# Altium PCB PCB1.PcbDoc
Units mil, origin at the board's own origin, x right, y up, seen from the top; angles counter-clockwise.
Board outline 2950 x 500 mil, 2 copper layers (Top Layer, Bottom Layer); 32 components, 25 nets, 151 pads, 54 vias.
Unrouted connection lines stored in the file: 3.
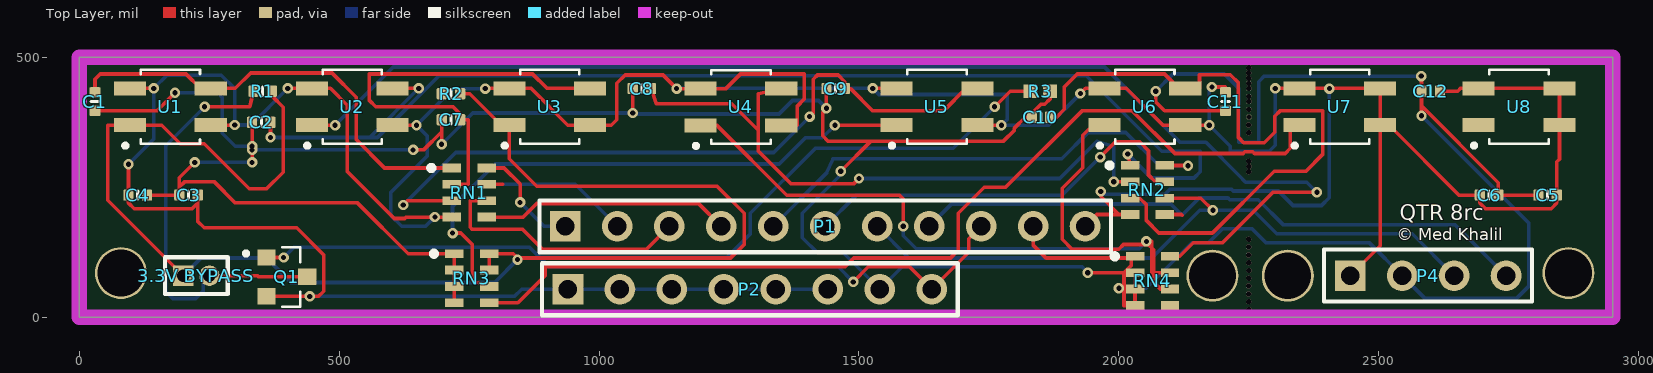
[diagram p0: Top Layer view]
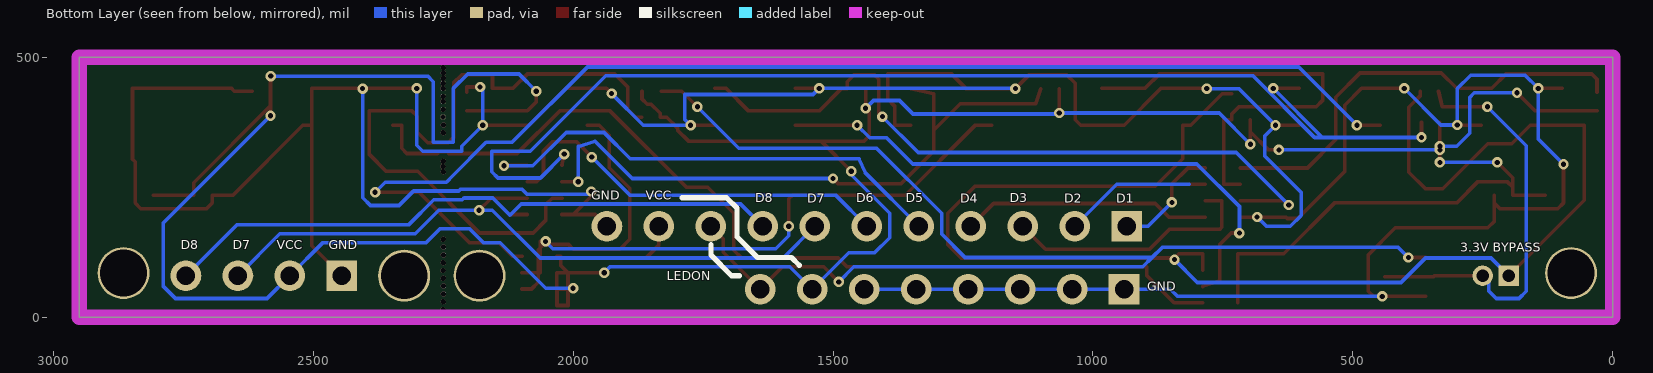
[diagram p1: Bottom Layer view, seen from below]
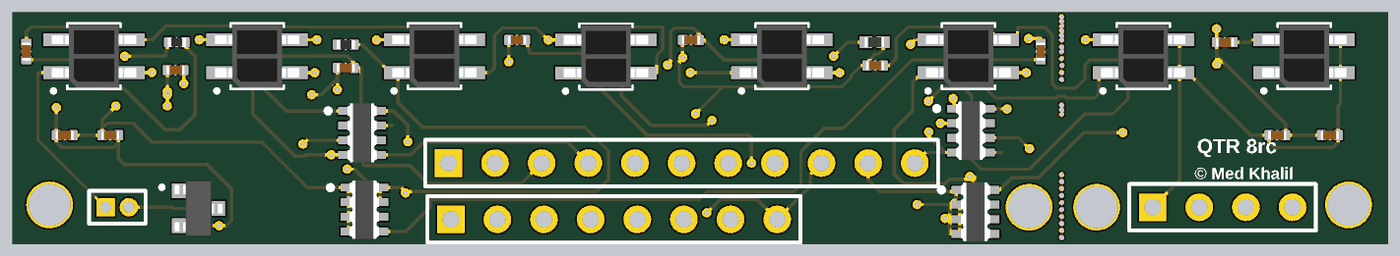
[diagram p2: 3D render of the assembled board from above, using the file's embedded part models]

## Layer stack, top to bottom
Top Solder: solder mask 0.4, Solder Resist, Dk 3.5
Top Layer: signal copper 1.4
Dielectric 1: dielectric 12.6, FR-4, Dk 4.8
Bottom Layer: signal copper 1.4
Bottom Solder: solder mask 0.4, Solder Resist, Dk 3.5

## Board outline
0,0 0,500 2950,500 2950,0

## Design rules (kind name [scope] priority, off if disabled: settings)
Clearance [All] p1: gap=10 ignorepadtopadclearanceinfootprint=FALSE
PolygonConnect [All] p1: connectstyle=Relief reliefconductorwidth=10 reliefentries=4 polygonreliefangle="90 Angle" airgapwidth=10
RoutingVias [All] p1: holewidth=10 width=20 viastyle="Through Hole" minholewidth=10 minwidth=20 maxholewidth=10 maxwidth=20
SolderMaskExpansion [All] p1: expansion=4 istentingtop=FALSE
SupplyNets "Schematic Supply Nets_2" [InNet('GND')] p1: voltage=0.000
SupplyNets "Schematic Supply Nets" [InNet('VCC')] p2: voltage=0.000
Width [All] p1: maxlimit=7 minlimit=7 preferedwidth=7 minimp=50.000000 maximp=50.000000 favimp=50.000000
30 further rules are at their usual default settings.

## Components (designator, comment, footprint, x,y, rotation, side; value= is the part's Value field where it differs from the comment)
"3.3V BYPASS" "MHDR1X2" MHDR1X2 200,80 r0 top
C1 "Capacitor 100nF +/-20% 10V 0402" CAPC0402(1005)60_L 30,415 r90 top value=10nF
C2 "Capacitor 100nF +/-20% 10V 0402" CAPC0402(1005)60_L 350,375 r0 top value=10nF
C3 "Capacitor 100nF +/-20% 10V 0402" CAPC0402(1005)60_L 210,235 r180 top value=1µF
C4 "Capacitor 100nF +/-20% 10V 0402" CAPC0402(1005)60_L 112.28,235 r0 top value=100nF
C5 "Capacitor 100nF +/-20% 10V 0402" CAPC0402(1005)60_L 2825,235 r180 top value=1µF
C6 "Capacitor 100nF +/-20% 10V 0402" CAPC0402(1005)60_L 2712.28,235 r0 top value=100nF
C7 "Capacitor 100nF +/-20% 10V 0402" CAPC0402(1005)60_L 715,380 r0 top value=10nF
C8 "Capacitor 100nF +/-20% 10V 0402" CAPC0402(1005)60_L 1082.28,440 r0 top value=10nF
C9 "Capacitor 100nF +/-20% 10V 0402" CAPC0402(1005)60_L 1455,440 r0 top value=10nF
C10 "Capacitor 100nF +/-20% 10V 0402" CAPC0402(1005)60_L 1850,385 r0 top value=10nF
C11 "Capacitor 100nF +/-20% 10V 0402" CAPC0402(1005)60_L 2205,415 r90 top value=10nF
C12 "Capacitor 100nF +/-20% 10V 0402" CAPC0402(1005)60_L 2600,435 r0 top value=10nF
P1 "Header 11" HDR1X11 935,175 r0 top
P2 "Header 8" HDR1X8 940,53.94 r0 top
P4 "Header 4" HDR1X4 2445,80 r0 top
Q1 "2N7002" TRANS_2N7002 399.37,77.6 r0 top
R1 "Resistor 9K1  +/-5 % 0402 63 mW" RESC0402(1005)_L 352.72,435 r0 top value=47
R2 "Resistor 9K1  +/-5 % 0402 63 mW" RESC0402(1005)_L 715,430 r0 top value=47
R3 "Resistor 51k +/-5% 0402 63 mW" RESC1005X40X25ML05T10 1848.7,435 r0 top value=47k
RN1 "CAY16-102J4LF" BOUR-CAY16-J4_V 750,240 r0 top value=1k
RN2 "CAY16-102J4LF" BOUR-CAY16-J4_V 2055,245 r0 top value=1k
RN3 "CAY16-102J4LF" BOUR-CAY16-J4_V 755,75 r0 top value=1k
RN4 "CAY16-102J4LF" BOUR-CAY16-J4_V 2065,70 r0 top value=1k
U1 "QRE1113GR" SOIC180P460X187-4N 175,405 r90 top
U2 "QRE1113GR" SOIC180P460X187-4N 525,405 r90 top
U3 "QRE1113GR" SOIC180P460X187-4N 905,405 r90 top
U4 "QRE1113GR" SOIC180P460X187-4N 1272.76,404.57 r90 top
U5 "QRE1113GR" SOIC180P460X187-4N 1650,405 r90 top
U6 "QRE1113GR" SOIC180P460X187-4N 2050,405 r90 top
U7 "QRE1113GR" SOIC180P460X187-4N 2425,405 r90 top
U8 "QRE1113GR" SOIC180P460X187-4N 2770,405 r90 top

## Footprints (in the part's own frame and the unit in brackets; to place one, negate y for a bottom-side part, rotate by r counter-clockwise, add the part's x,y. Pads: shape width x height; smd on the part's side, far side on the other; paste and mask are expansions set on the pad)
BOUR-CAY16-J4_V [mm] "SMD, 8-Leads, Body 1.6x3.2mm, Pitch 0.8mm"
  rect 0.9x0.425 smd: 1(-0.85,1.2) 2(-0.85,0.4) 3(-0.85,-0.4) 4(-0.85,-1.2) 5(0.85,-1.2) 6(0.85,-0.4) 7(0.85,0.4) 8(0.85,1.2)
  silkscreen extent -1.97,1.08 -1.72,1.32, body extent -0.8,-1.6 0.8,1.6, height 0.6
CAPC0402(1005)60_L [mm] "Chip Capacitor, Body 1.0x0.5mm, Height 0.6mm, IPC High Density"
  rrect25% 0.5x0.55 smd: 1(-0.45,0) 2(0.45,0)
  silkscreen extent 0,-0.2 0,0.2, body extent -0.5,-0.25 0.5,0.25, height 0.6
HDR1X4 [mm] "Connector; Header; 4 Position"
  rect 1.5x1.5 hole 0.9: 1(0,0)
  round 1.5 hole 0.9: 2(2.54,0) 3(5.08,0) 4(7.62,0)
  silkscreen extent -1.27,-1.27 8.89,1.27
HDR1X8 [mm] "Connector; Header; 8 Position"
  rect 1.5x1.5 hole 0.9: 1(0,0)
  round 1.5 hole 0.9: 2(2.54,0) 3(5.08,0) 4(7.62,0) 5(10.16,0) 6(12.7,0) 7(15.24,0) 8(17.78,0)
  silkscreen extent -1.27,-1.27 19.05,1.27
HDR1X11 [mm] "Connector; Header; 11 Position"
  rect 1.5x1.5 hole 0.9: 1(0,0)
  round 1.5 hole 0.9: 2(2.54,0) 3(5.08,0) 4(7.62,0) 5(10.16,0) 6(12.7,0) 7(15.24,0) 8(17.78,0) 9(20.32,0) 10(22.86,0) 11(25.4,0)
  silkscreen extent -1.27,-1.27 26.67,1.27
MHDR1X2 [mm] "Connector; Header; 2 Position"
  rect 1x1 hole 0.6: 1(0,0)
  round 1 hole 0.6: 2(1.27,0)
  silkscreen extent -0.9,-0.9 2.17,0.9
RESC0402(1005)_L [mm] "Chip Resistor, Body 1.0x0.5mm, IPC High Density"
  rrect25% 0.5x0.55 smd: 1(-0.45,0) 2(0.45,0)
  silkscreen extent 0,-0.2 0,0.2, body extent -0.5,-0.25 0.5,0.25, height 0.3
RESC1005X40X25ML05T10 [mm] "Chip Resistor, 2-Leads, Body 1.05x0.55mm, IPC Low Density"
  rect 0.7x0.65 smd: 1(-0.475,0) 2(0.475,0)
  body extent -0.53,-0.28 0.53,0.28, height 0.4
SOIC180P460X187-4N [mm]
  rect 0.69x1.57 smd: 1(-0.9,1.975) 2(-0.9,-1.975) 3(0.9,-1.975) 4(0.9,1.975)
  silkscreen extent -2,-1.45 1.8,2.3, body extent -1.7,-2.3 1.7,2.3, height 1.87
TRANS_2N7002 [mm]
  rect 0.9x0.8 smd: 1(-1,0.95) 2(-1,-0.95) 3(1,0)
  silkscreen extent -2.1,-1.45 0.65,1.45, body extent -1.3,-1.53 1.3,1.52, height 1.3

## Part data
"3.3V BYPASS": library part CMP-002-00385-1, "Header, 2-Pin", Component Type=Standard, Design Item ID=MHDR1X2, LatestRevisionDate=17-Jul-2002, LatestRevisionNote="Re-released for DXP Platform.", Pins=2, Publisher="Altium Limited", Source="Miscellaneous Connectors.SchLib"
C1 C2 C3 C4 C5 C6 C7 C8 C9 C10 C11 C12: library part CMP-001-00061-3, "Chip Capacitor, 100nF +/-20%, 10V, 0402, Thickness 0.6 mm", Case/Package=0402, Max Operating Temperature=85°C, Min Operating Temperature=-55°C, Tolerance=20%, Voltage Rating=10V, Mounting Technology=SMT, Pins=2
P1: library part CMP-002-00098-1, "Header, 11-Pin", Component Type=Standard, Design Item ID="Header 11", LatestRevisionDate=17-Jul-2002, LatestRevisionNote="Re-released for DXP Platform.", Pins=11, Publisher="Altium Limited", Source="Miscellaneous Connectors.SchLib"
P2: library part CMP-002-00188-1, "Header, 8-Pin", Component Type=Standard, Design Item ID="Header 8", LatestRevisionDate=17-Jul-2002, LatestRevisionNote="Re-released for DXP Platform.", Pins=8, Publisher="Altium Limited", Source="Miscellaneous Connectors.SchLib"
P4: library part CMP-002-00168-1, "Header, 4-Pin", Component Type=Standard, Design Item ID="Header 4", LatestRevisionDate=17-Jul-2002, LatestRevisionNote="Re-released for DXP Platform.", Pins=4, Publisher="Altium Limited", Source="Miscellaneous Connectors.SchLib"
Q1: "MOSFET, SOT-23, N, 60V, 0.28A, 5â„", Package="SOT-23 Diotec", Check_prices=https://www.snapeda.com/parts/2N7002/Diotec/view-part/?ref=eda, MF="Diotec Semiconductor", MP=2N7002, SnapEDA_Link=https://www.snapeda.com/parts/2N7002/Diotec/view-part/?ref=snap
R1 R2: library part CMP-009-00135-3, "Chip Resistor, 9,1 kOhms, +/-5 %, 63 mW, -55 to 155 degC, 0402", Case/Package=0402, Max Operating Temperature=155°C, Min Operating Temperature=-55°C, Power=63mW, Tolerance=5%, Pins=2
R3: library part CMP-009-00000-5, "Chip Resistor, 51 KOhm, +/- 5%, 0.063 W, -55 to 155 degC, 0402 (1005 Metric)", Case/Package=0402, Max Operating Temperature=155°C, Min Operating Temperature=-55°C, Power=63mW, Tolerance=5%, Mounting Technology=SM, Pins=2, RoHS Compliant=True
RN1 RN2 RN3 RN4: library part CMP-009-00042-4, "Chip Resistor Array, 1 KOhm, +/- 5%, 62.5 mW, -55 to 125 degC, 8-Pin SMD, RoHS, Tape and Reel", Case/Package=1205, Manufacturer=Bourns, Max Operating Temperature=125°C, Min Operating Temperature=-55°C, Package Description="8-Pin Surface Mount Device, Body 1.6 x 3.2 mm, Pitch 0.8 mm", Package Quantity=5000, Package Reference=CAY16-J4, Power=250mW, Tolerance=5%, Voltage Rating=50V, Datasheet URL=http://www.bourns.com/pdfs/CATCAY.pdf, Datasheet Version=Sep-14, Elements=4, Manufacturer URL=http://www.bourns.com/, Mounting Technology=SM, Packaging=TapeandReel, Pins=8, RoHS Compliant=True
U1 U2 U3 U4 U5 U6 U7 U8: "Reflective Optical Sensor 0.039 (1mm) 4-SMD, Gull Wing", Package="ARUSM-313-4 ON Semiconductor", Availability="In Stock", Check_prices=https://www.snapeda.com/parts/QRE1113GR/Onsemi/view-part/?ref=eda, MF="ON Semiconductor", MP=QRE1113GR, Price=None, Purchase-URL=https://pricing.snapeda.com/search/part/QRE1113GR/?ref=eda, SnapEDA_Link=https://www.snapeda.com/parts/QRE1113GR/Onsemi/view-part/?ref=snap

## Free pads (board coordinates)
  round 100 hole 90: 15(80,85) 15(2180,80) 15(2325,80) 15(2865,85)
  round 10 hole 10: 17(2250,15) 17(2250,30) 17(2250,45) 17(2250,60) 17(2250,75) 17(2250,90) 17(2250,105) 17(2250,120) 17(2250,135) 17(2250,150) 17(2250,280) 17(2250,290) 17(2250,300) 17(2250,355) 17(2250,370) 17(2250,400) 17(2250,415) 17(2250,425) 17(2250,440) 17(2250,450) 17(2250,460) 17(2250,470) 17(2250,480) 17(2250,490) 17(2250.38,385.3)

## Via types
v1: diameter 20, hole 10, Top Layer to Bottom Layer, 54 vias

## Nets (pads, with @x,y where several pads share a name; then routed paths per layer and width w, separated by ;. In a path a pad name is that pad's centre, name@x,y a point inside that pad or via, vN(x,y) a via of type N, cw(c..) or ccw(c..) an arc to the next point about the centre after c; other vN are vias at no path point)
D1: P1.1 RN1.8 | length 218.7
  Top Layer w7: RN1.8 817,287.24 848,256.24 v1(848,221)
  Bottom Layer w7: v1(848,221) 894,175 P1.1
D2: P1.2 RN1.7 | length 285
  Top Layer w7: RN1.7 814.75,255.75
  Bottom Layer w7: 814.75,255.75 954.25,255.75 P1.2
D3: P1.3 RN1.6 | length 501.3
  Top Layer w7: RN1.6 752,224.25 752,173 755.48,169.52 852.48,169.52 891,131 1091,131 P1.3
D4: P1.4 RN1.5 | length 480.6
  Top Layer w7: RN1.5 854,192.76 880.24,219 1191,219 P1.4
D5: P1.5 RN2.8 | length 950.3
  Top Layer w7: RN2.8 2088.84,291.87 2132.63,291.87 v1(2133,291.5)
  Bottom Layer w7: P1.5 1437.49,277.49 1450,304.77 1890,304.77 1940.73,355.5 2013.5,355.5 2077.5,291.5 v1(2133,291.5)
D6: P1.6 RN2.7 | length 780
  Top Layer w7: v1(1964.15,308.15) 1993.5,337.5 2040,337.5 2057,320.5 2057,273.75 2070,260.75 RN2.7
  Bottom Layer w7: P1.6 1495.03,235.03 1891.03,235.03 v1(1964.15,308.15)
D7: P1.7 P4.3 RN2.6 | length 1327.7
  Top Layer w7: RN2.6 2157.75,229.25 v1(2181,206)
  Bottom Layer w7: P1.7 1596,114 2063.5,114 2155.5,206 v1(2181,206) 2258.71,206 2304.05,160.66 2564.34,160.66 P4.3
D8: P1.8 P4.4 RN2.5 | length 1246.2
  Top Layer w7: RN2.5 2120.24,197.76 2121.62,196.38
  Bottom Layer w7: P1.8 1678.03,218.03 2099.97,218.03 2121.62,196.38 2154.74,229.5 2209.85,229.5 2213.35,226 2268.46,226 2316.8,177.66 2647.34,177.66 P4.4
GND: C3.1 C4.1 C5.1 C6.1 C11.2 C12.2 P1.11 P2.1 P2.2 P2.3 P2.4 P2.5 P2.6 P4.1 Q1.2 RN1.4 RN2.4 U1.2 U1.4 U2.2 U2.4 U3.2 U3.4 U4.2 U4.4 U5.2 U5.4 U6.2 U6.4 U7.2 U7.3 U7.4 U8.2 U8.3 U8.4 | length 8182.6
  Top Layer w7: v1(94.57,294.57) C4.1 94.57,220 105.57,209 216.72,209 227.72,220 ; U1.4 v1(143,440.43) ; C3.1 227.72,220 ; U1.2 298.57,369.57 v1(299,370) ; Q1.2 v1(443.2,40.2) 460,40.2 470,50.2 470,120 418,172 240,172 227.72,184.28 227.72,220 ; v1(401,440.43) U2.4 483,440.43 515.5,407.93 515.5,280.5 606,190 626,190 628.76,192.76 v1@684.24,192.76 ; U2.2 v1(648.66,369.57) ; v1(684,193) v1@684.24,192.76 ; RN1.4 v1@684.24,192.76 ; v1(781,440) 781.43,440.43 U3.4 869,440.43 939.87,369.57 U3.2 1023.57,369.57 1034,380 1034,450 1050,466 1123,466 v1(1149,440) U4.4 1244,440 1272,468 1394.92,468 1394.92,419.92 1381.5,406.5 1381.5,369.13 U4.2 ; v1(1526.43,440.43) U5.4 ; U5.2 v1(1774,369.57) ; v1(1926,430.43) 1936,440.43 U6.4 2014,440.43 2084.87,369.57 U6.2 v1(2174,369.57) ; P1.11 1957.76,197.76 2000,197.76 ; v1(1965,242) 1965,232.76 2000,197.76 ; RN2.4 2000,197.76 ; v1(2179,443) 2205,443 C11.2 ; v1(2301,440.43) U7.4 v1@2404.57,440.43 ; v1(2405,440) v1@2404.57,440.43 ; P4.1 2502.76,137.76 U7.2 ; C12.2 2652,435 2657.43,440.43 U8.4 U8.3 U8.2 2847.76,304.04 2842.72,299 C5.1 2842.72,220 2831.72,209 2705.57,209 2694.57,220 C6.1 2654.57,235 2520,369.57 U7.2 ; v1@2404.57,440.43 U7.3 U7.2
  Bottom Layer w7: v1(94.57,294.57) 143,343 v1(143,440.43) 168.45,465.89 273.11,465.89 299,440 v1(299,370) 330.57,370 v1(401,440.43) ; v1(443.2,40.2) 837.2,40.2 850.94,53.94 P2.1 P2.2 P2.3 P2.4 P2.5 P2.6 ; v1(684,193) 666,175 620,175 599,196 599,240 669,310 669,349.23 v1(648.66,369.57) 719.1,440 v1(781,440) ; v1(1149,440) 1149.43,440.43 v1(1526.43,440.43) 1538.37,428.5 1785,428.5 1785,380.57 v1(1774,369.57) 1865.13,369.57 v1(1926,430.43) ; v1(1965,242) 1970,237 2089,237 2098.5,246.5 2216.9,246.5 2220.4,243 2307,243 2335,215 2390,215 2405,230 v1(2405,440) ; v1(2179,443) 2174,438 v1(2174,369.57) 2214.5,329.07 2214.5,319.5 2289.5,319.5 2301,331 v1(2301,440.43)
L1: "3.3V BYPASS.1" R1.2 R2.2 RN3.7 RN3.8 U1.1 U3.1 | length 2890.8
  Top Layer w7: 200,80 54.75,225.25 54.75,369.57 U1.1 158.43,369.57 194,334 240,334 327,247 360,247 392,279 392,404 370.43,425.57 R1.2 ; R2.2 751,430 811.43,369.57 U3.1@827,369.57 ; RN3.7 RN3.8 834.72,122.24 843,113.97 v1@845.97,113.97 ; U3.1 U3.1@827,369.57 ; v1(843,111) v1@845.97,113.97 ; U3.1@827,369.57 827,305 880,252 1227,252 1279,200 1279,140 1252.97,113.97 v1@845.97,113.97
  Bottom Layer w7: 200,80 234,114 360,114 407,67 799,67 v1(843,111)
L3: RN3.6 U5.1 | length 1121.4
  Top Layer w7: v1(718,162) 734,162 756,140 756,70 RN3.6 ; v1(1453.63,369.57) U5.1
  Bottom Layer w7: v1(718,162) 718,213 800,295 1346.76,295 1397.01,345.25 1429.32,345.25 v1(1453.63,369.57)
L4: RN3.5 U7.1 | length 1848.8
  Top Layer w7: RN3.5 843.76,27.76 896,80 896,96.97 1473.14,96.97 1490.14,113.97 1675.97,113.97 1691,129 1691,200 1741,250 1782,250 1929,397 2026,397 2108,315 2238.84,315 2242.34,318.5 2257.66,318.5 2261.16,315 2320,315 2330,325 2330,369.57 U7.1
L5: RN4.8 U2.1 | length 2413.6
  Top Layer w7: U2.1 v1(492,369.57) ; RN4.8 2117,117.24 2143.26,143.5 2199.5,143.5 2296.59,240.59 v1(2381,240.59)
  Bottom Layer w7: v1(492,369.57) 603.93,481.5 1972.5,481.5 2117.5,336.5 2167.5,336.5 2231.5,272.5 2231.5,272.34 2243.84,260 2361.59,260 v1(2381,240.59)
L6: RN4.7 U4.1 | length 1109.4
  Top Layer w7: U4.1 1226.87,369.13 1361,235 1578,235 1585,228 v1(1585,175) ; v1(2053,146) 2063,146 2063,85.75 RN4.7
  Bottom Layer w7: v1(1585,175) 1585,156.97 1610,131.97 2038.97,131.97 v1(2053,146)
L7: RN4.6 U6.1 | length 557.6
  Top Layer w7: U6.1 1950,369.57 1930.43,350 1930.43,287.43 1891,248 1891,150 1910,131 2000,131 2009,140 2057,140 2067,130 2067,67.25 2080,54.25 RN4.6
L8: RN4.5 U8.1
LEDON: P1.9 P2.8 Q1.1 R3.1 | length 2606
  Top Layer w7: Q1.1 v1(393,115) ; v1(1489,68) 1517.97,96.97 1596.97,96.97 P2.8 1711.04,124.98 1711.04,151.04 P1.9 ; v1(1761,405) 1791,435 R3.1
  Bottom Layer w7: v1(393,115) 412.91,134.91 866.22,134.91 886.12,115 ; v1(1489,68) 1460,97 904.12,97 886.12,115 ; v1(1761,405) 1681.35,325.35 1416.35,325.35 1291,200 1291,160 1246,115 886.12,115
"Net3.3V BYPASS_2": "3.3V BYPASS.2" Q1.3 R1.1 | length 812.2
  Top Layer w7: v1(241,405) 328,405 R1.1 ; 250,80 343,80 345.4,77.6 Q1.3
  Bottom Layer w7: v1(241,405) 166,330 166,50 180,36 224,36 238,50 238,68 250,80
R1: C1.2 RN1.1 U1.3 | length 863.1
  Top Layer w7: C1.2 30,458 40,468 205,468 232.57,440.43 U1.3 300,440.43 329.57,470 486,470 532.5,423.5 532.5,341.89 587.15,287.24 RN1.1
R2: C7.2 RN1.2 U3.3 | length 854.8
  Top Layer w7: RN1.2 748,255.75 748,380 C7.2 732.72,391.28 719,405 570,405 558,417 558,468 872,468 899.57,440.43 U3.3
R3: C9.2 RN1.3 U5.3 | length 1397.7
  Top Layer w7: v1(623,216) 631.25,224.25 RN1.3 ; v1(1405,386) 1411.92,392.92 1411.92,457.92 1420,466 1460,466 1472.72,453.28 C9.2 1483.5,440 1526.5,397 1662.57,397 1706,440.43 U5.3
  Bottom Layer w7: v1(623,216) 724,317 1336,317 v1(1405,386)
R5: C2.2 RN2.1 U2.3 | length 2336
  Top Layer w7: v1(367.72,346) C2.2 ; U2.3 v1(653,440.43) ; v1(2017,314) RN2.1
  Bottom Layer w7: v1(367.72,346) 558.57,346 ; v1(653,440.43) 558.57,346 ; v1(2017,314) 2063,268 2144.5,268 2156.5,280 2156.5,319.5 2082.5,319.5 1937.5,464.5 691.93,464.5 573.43,346 558.57,346
R6: C8.2 RN2.2 U4.3 | length 1248.4
  Top Layer w7: C8.2 1110,411 1255,411 1306,360 ; U4.3 1306,430 1306,360 ; v1(1500,267) 1489.57,256.57 1369.43,256.57 1306,320 1306,360 ; v1(1990,260.75) RN2.2
  Bottom Layer w7: v1(1500,267) 1886.44,267 1957.94,338.5 1990,328.5 v1(1990,260.75)
R7: C10.2 RN2.3 U6.3 | length 1343.2
  Top Layer w7: C10.2 1880,385 1895,400 1895,443 1920,468 2088,468 2115.57,440.43 U6.3 2155.16,440.43 2155.16,466.74 2214.26,466.74 2230,451 2230,346 2240,336 2280,336 2300,356 2300,387 2310,397 2392,397 2392,313 2360,281 2299,281 2180,162 2077,162 2053,186 2053,216.25 2040,229.25 RN2.3
VCC: C1.1 C2.1 C3.2 C4.2 C5.2 C6.2 C7.1 C8.1 C9.1 C10.1 C11.1 C12.1 P1.10 P2.7 P4.2 R3.2 RN3.1 RN3.2 RN3.3 RN3.4 RN4.1 RN4.2 RN4.3 RN4.4 | length 7314.3
  Top Layer w7: C1.1 149.28,397.28 v1(184,432) ; C4.2 C3.2 192.28,250 ; v1(222,298) 192.28,268.28 192.28,250 ; v1(332.28,298) v1(332.28,322) v1(332.28,329) C2.1 ; v1(642,322) 662,322 697,357 ; v1(697,333) 697,357 ; RN3.4 721,27.76 721,59.25 RN3.3 RN3.2 721,90.75 RN3.1@721,122.24 ; RN3.1 RN3.1@721,122.24 ; v1(1064.57,393) C8.1 ; C9.1 v1(1437.28,402) 1430,394.72 1430,349 1440,339 1523,339 ; v1(1465,281) 1523,339 ; P1.10 1835,139 1860,114 2022.76,114 RN4.1@2023.95,115.19 ; R3.2 1867.4,420 1857.4,410 1850,410 1832.28,392.28 C10.1 1820,385 1799,364 1799,360 1778,339 1523,339 ; v1(1940.25,85.75) 2010,85.75 ; v1(2000,56) 2001.75,54.25 2010,54.25 ; RN4.4 RN4.4@2031,22.76 ; RN4.1 RN4.1@2026,117.24 ; v1(2071,435) 2071,414.28 2088,397.28 C11.1 ; v1(2582,464) 2582.28,463.72 C12.1 2582.28,406.72 ; v1(2582.28,387.72) 2582.28,406.72 ; C5.2 C6.2 2730,259 2582.28,406.72 ; 192.28,250 203.28,261 259,261 300,220 535.24,220 633,122.24 RN3.1@721,122.24 ; 697,357 697.28,357.28 C7.1 697,357 ; 2010,54.25 RN4.3@2031,54.25 ; 2010,54.25 2010,85.75 ; 2010,54.25 2010,22.76 RN4.4@2031,22.76 ; 2010,85.75 2023.95,99.7 RN4.1@2023.95,115.19 ; 2010,85.75 RN4.2 RN4.3 RN4.3@2031,54.25 ; RN4.1@2023.95,115.19 RN4.1@2026,117.24 ; RN4.1@2023.95,115.19 2023.95,117.24 RN4.1@2026,117.24 ; RN4.4@2031,22.76 RN4.3@2031,54.25
  Bottom Layer w7: v1(184,432) 266,432 275,423 275,354 300,329 v1(332.28,329) ; v1(222,298) v1(332.28,298) ; v1(332.28,322) v1(642,322) ; v1(697,333) 757,393 v1(1064.57,393) 1066.57,391 1346,391 1372,417 1422.28,417 v1(1437.28,402) ; v1(1465,281) 1465,274 1391,200 1391,153 1420,124 1469.94,124 P2.7 1583.06,97 1929,97 v1(1940.25,85.75) ; v1(2000,56) 2052.5,56 2140,143.5 2172.5,143.5 2199,170 2256.46,170 2282.8,143.66 2481.34,143.66 P4.2 2589,36 2765,36 2789,60 2789,181 v1(2582.28,387.72) ; v1(2071,435) 2104,468 2203,468 2231,440 2231,336.5 2269,336.5 2269,453 2280,464 v1(2582,464)
pads on no net: R2.1

## Keep-outs
Keep-Out Layer:
  the board outline again, w30

## Silkscreen, mask and mechanical layers (free items; w line width, h text height)
Top Overlay:
  text "QTR 8rc" at 2540,177.43 h50
  text "© Med Khalil" at 2535,140.63 h40
Bottom Overlay:
  lines w10: 1565,100 1580,115 1645,115 1685,155 1685,210 1705,230 1790,230 ; 1680,80 1695,80 1735,120 1735,140
  text "VCC" at 1859.97,220.33 h30
  text "GND" at 1965,220.33 h30
  text "D1" at 955,215 h30
  text "D2" at 1055,215 h30
  text "D3" at 1160,215.33 h30
  text "D4" at 1255,215 h30
  text "D5" at 1360,215.33 h30
  text "D6" at 1455,215.33 h30
  text "D7" at 1550,215 h30
  text "D8" at 1650,215.33 h30
  text "GND" at 2470,125.33 h30
  text "VCC" at 2569.97,125.33 h30
  text "D7" at 2655,125 h30
  text "D8" at 2755,125.33 h30
  text "LEDON" at 1820,65.33 h30
  text "GND" at 895,45.33 h30